# Altium PCB SQUIDCtr_Rev0.PcbDoc (part 3 of 4)
Units mil, origin at the board's own origin, x right, y up, seen from the top; angles counter-clockwise.
Board outline 5765 x 2940 mil, 6 copper layers (Top Layer, Internal Plane 1, Mid-Layer 1, InternalPlane 2, Mid-Layer 2, Bottom Layer), stack 62.5 mil thick; 583 components, 307 nets, 1511 pads, 451 vias.
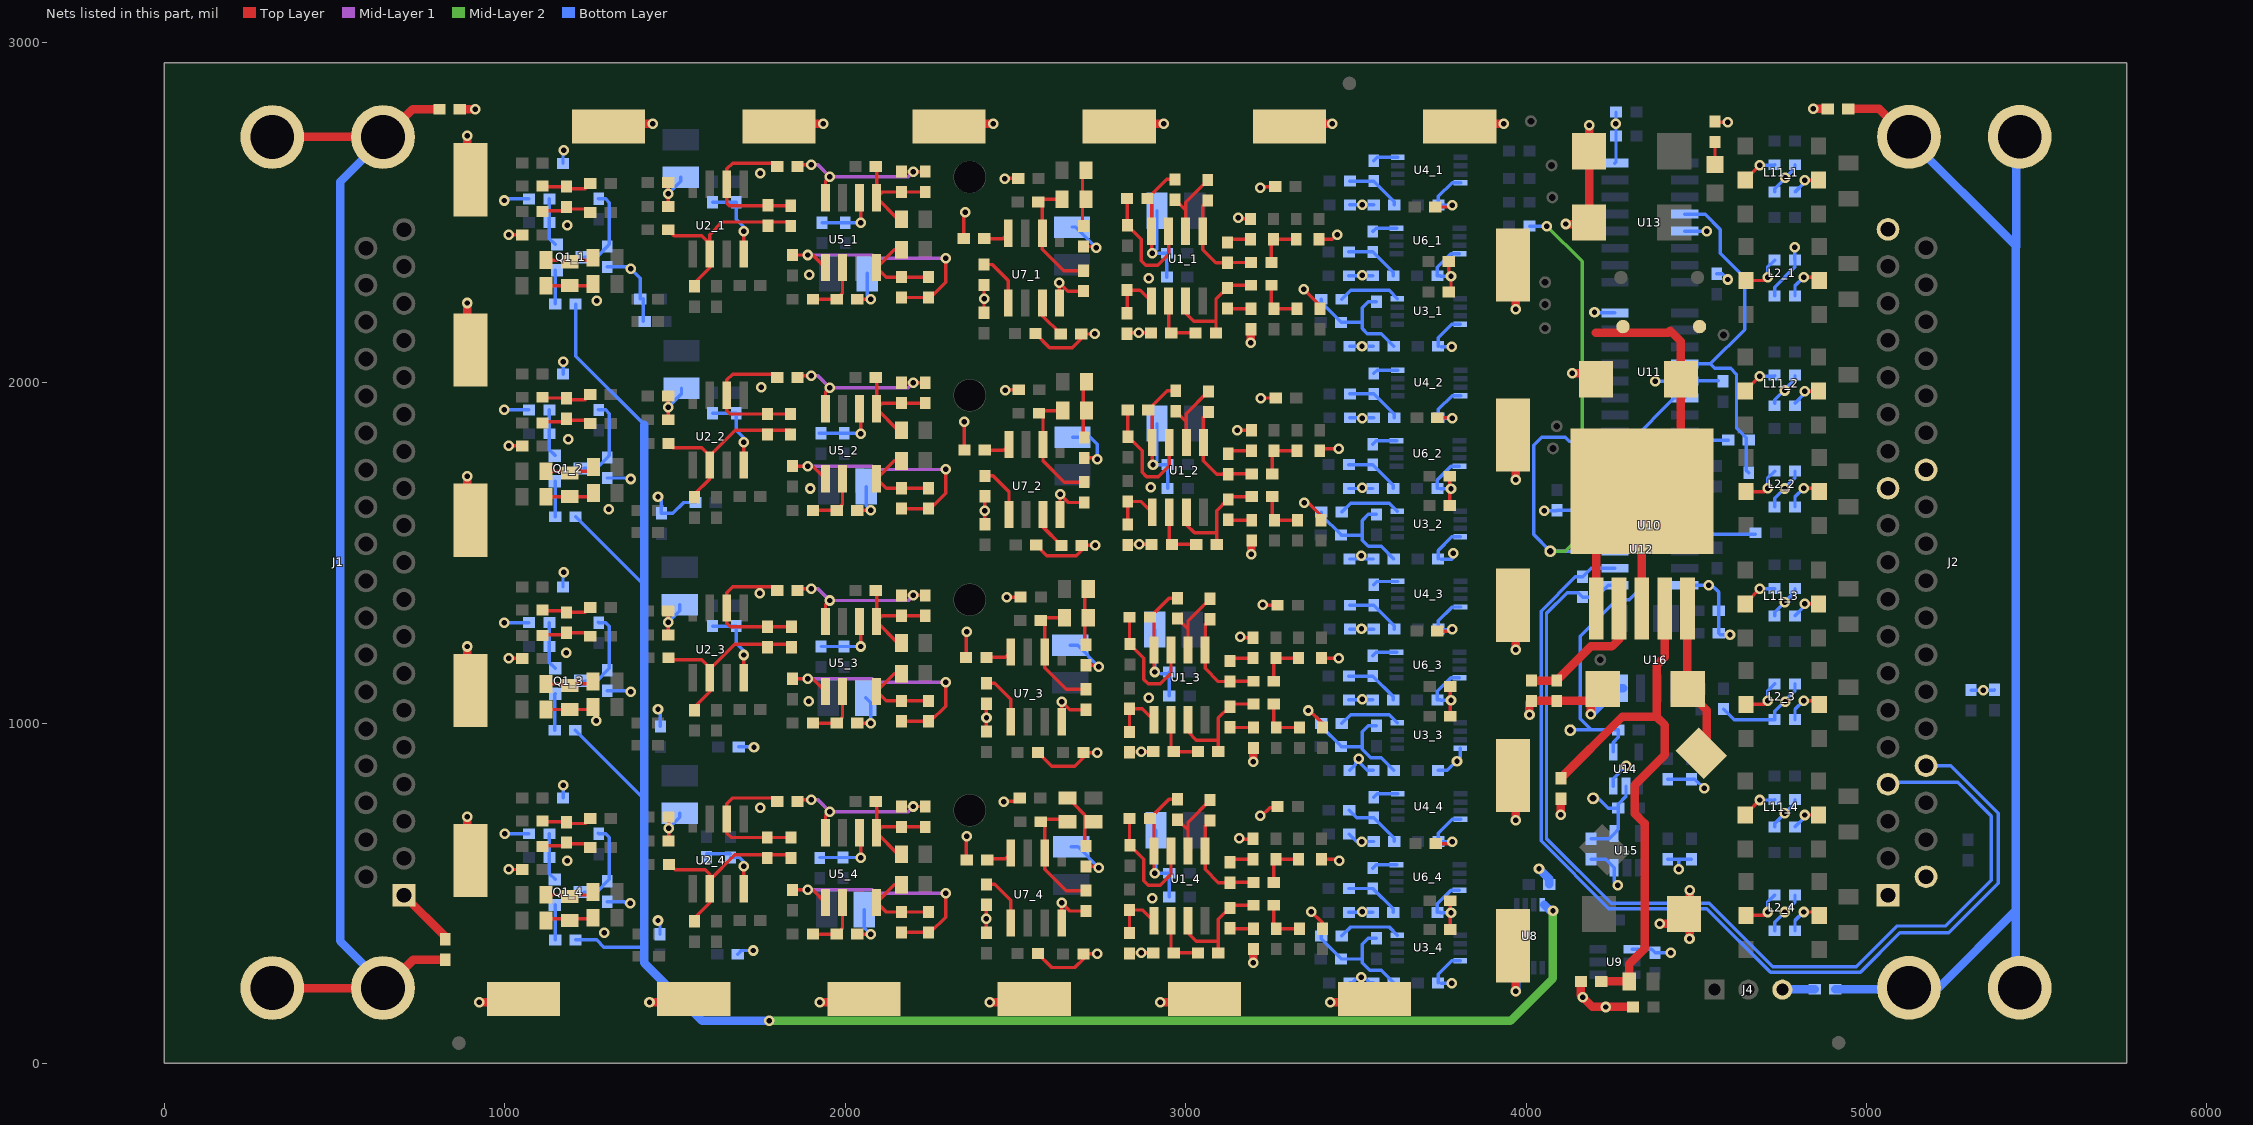
[diagram p7: the nets of this part, all layers, seen from the top]

## Via types
v1: diameter 31, hole 16, Top Layer to Bottom Layer, tented both sides, 451 vias

## Nets (pads, with @x,y where several pads share a name; then routed paths per layer and width w, separated by ;. In a path a pad name is that pad's centre, name@x,y a point inside that pad or via, vN(x,y) a via of type N, cw(c..) or ccw(c..) an arc to the next point about the centre after c; other vN are vias at no path point) (continued)
GND: C1.1 C2.1 C4.1 C5_1.1 C5_2.1 C5_3.1 C5_4.1 C6_1.1 C6_2.1 C6_3.1 C6_4.1 C7_1.1 C7_2.1 C7_3.1 C7_4.1 C8_1.1 C8_2.1 C8_3.1 C8_4.1 C9_1.1 C9_2.1 C9_3.1 C9_4.1 C10.1 C11_1.2 C11_2.2 C11_3.2 C11_4.2 C12_1.2 C12_2.2 C12_3.2 C12_4.2 C13_1.2 C13_2.2 C13_3.2 C13_4.2 C14_1.1 C14_2.1 C14_3.1 C14_4.1 C15_1.2 C15_2.2 C15_3.2 C15_4.2 C16_1.1 C16_2.1 C16_3.1 C16_4.1 C17_1.1 C17_2.1 C17_3.1 C17_4.1 C18_1.1 C18_2.1 C18_3.1 C18_4.1 C19_1.1 C19_2.1 C19_3.1 C19_4.1 C20_1.1 C20_2.1 C20_3.1 C20_4.1 C21_1.1 C21_2.1 C21_3.1 C21_4.1 C22.1 C23.1 C24.2 C25.2 C26_1.2 C26_2.2 C26_3.2 C26_4.2 C27.2 C28.2 C29.2 C30.1 C31.1 C32.1 C33.1 C34.1 C35.1 C36.1 C37.1 C38.1 C39_1.1 C39_2.1 C39_3.1 C39_4.1 C41_1.1 C41_2.1 C41_3.1 C41_4.1 C42_1.1 C42_2.1 C42_3.1 C42_4.1 C44.1 C45_1.1 C45_2.1 C45_3.1 C45_4.1 C46_1.2 C46_2.2 C46_3.2 C46_4.2 C47_1.1 C47_2.1 C47_3.1 C47_4.1 C48_1.1 C48_2.1 C48_3.1 C48_4.1 C49_1.2 C49_2.2 C49_3.2 C49_4.2 C50_1.2 C50_2.2 C50_3.2 C50_4.2 C51_1.2 C51_2.2 C51_3.2 C51_4.2 C52_1.1 C52_2.1 C52_3.1 C52_4.1 C53_1.1 C53_2.1 C53_3.1 C53_4.1 C54_1.1 C54_2.1 C54_3.1 C54_4.1 C55.1 C56.1 C57.1 C58_1.2 C58_2.2 C58_3.2 C58_4.2 C59_1.2 C59_2.2 C59_3.2 C59_4.2 C60_1.1 C60_2.1 C60_3.1 C60_4.1 C61_1.2 C61_2.2 C61_3.2 C61_4.2 C62_1.2 C62_2.2 C62_3.2 C62_4.2 C63_1.1 C63_2.1 C63_3.1 C63_4.1 C64_1.1 C64_2.1 C64_3.1 C64_4.1 C65_1.1 C65_2.1 C65_3.1 C65_4.1 C66_1.1 C66_2.1 C66_3.1 C66_4.1 C67_1.1 C67_2.1 C67_3.1 C67_4.1 C68_1.1 C68_2.1 C68_3.1 C68_4.1 C69_1.1 C69_2.1 C69_3.1 C69_4.1 J1.1 J2.1 J2.12 J2.19 J2.20 J2.31 J4.3 R9_1.2 R9_2.2 R9_3.2 R9_4.2 R17.1 R42.1 R43_1.2 R43_2.2 R43_3.2 R43_4.2 R46_1.2 R46_2.2 R46_3.2 R46_4.2 R47_1.1 R47_2.1 R47_3.1 R47_4.1 R48_1.2 R48_2.2 R48_3.2 R48_4.2 R62.2 R65_1.1 R65_2.1 R65_3.1 R65_4.1 R66.1 R68.1 R73.1 R77_1.1 R77_2.1 R77_3.1 R77_4.1 R78_1.2 R78_2.2 R78_3.2 R78_4.2 R79_1.1 R79_2.1 R79_3.1 R79_4.1 R80_1.2 R80_2.2 R80_3.2 R80_4.2 R83.1 R84.1 R85.2 SH1.1 SH2.1 SH3.1 SH4.1 SH5.1 SH6.1 SH8.1 SH9.1 SH10.1 SH11.1 SH12.1 SH13.1 SH14.1 SH16.1 SH17.1 SH18.1 SH19.1 SH20.1 SH21.1 SH22.1 SH23.1 SH24.1 U1_1.4 U1_2.4 U1_3.4 U1_4.4 U2_1.4 U2_2.4 U2_3.4 U2_4.4 U3_1.8 U3_2.8 U3_3.8 U3_4.8 U4_1.8 U4_2.8 U4_3.8 U4_4.8 U5_1.6 U5_2.6 U5_3.6 U5_4.6 U6_1.8 U6_2.8 U6_3.8 U6_4.8 U7_1.4 U7_2.4 U7_3.4 U7_4.4 U8.8 U9.1 U10.8 U10.12 U11.8 U11.13 U13.8 U13.13 U14.3 U15.3 U16.4 | length 20826.4
  Top Layer w10: R73.1@825,365 R73.1@825,372.72 ; v1(1011,570) R48_4.2@1051,570 ; v1(1011,1190) R48_3.2@1051,1190 ; v1(1011,1815) R48_2.2@1051,1815 ; v1(1011,2435) R48_1.2@1051,2435 ; C9_3.1@1480,1259 v1(1480,1296) C8_3.1@1480,1329 ; C9_1.1@1480,2518 v1(1480,2555) C8_1.1@1480,2588 ; C9_2.1@1480.07,1891.07 v1(1480.07,1928.07) C8_2.1@1480.07,1961.07 ; C9_4.1@1481,654 v1(1481,691) C8_4.1@1481,724 ; U2_4.4@1702,513 v1(1702,580) ; U2_3.4@1702,1133 v1(1702,1200) ; U2_2.4@1702,1758 v1(1702,1825) ; U2_1.4@1702,2378 v1(1702,2445) ; C7_4.1@2035,380 v1(2075,380) ; C7_3.1@2035,1000 v1(2075,1000) ; C7_2.1@2035,1625 v1(2075,1625) ; C7_1.1@2035,2245 v1(2075,2245) ; U5_4.6@2042,678 2045,675 v1(2045,605) ; U5_3.6@2042,1298 2045,1295 v1(2045,1225) ; U5_2.6@2042,1923 2045,1920 v1(2045,1850) ; U5_1.6@2042,2543 2045,2540 v1(2045,2470) ; R46_1.2@2348,2423 v1@2348,2501 ; R46_2.2@2350,1802 v1(2350,1885) ; R46_3.2@2355,1193 v1@2355,1268 ; R46_4.2@2356,609 v1@2356,667 ; C21_1.1@2408,2205 2407.5,2205.5 2407.5,2286.5 C52_1.1@2408,2287 ; C21_2.1@2410,1584 2409.5,1584.5 v1@2409.5,1622 ; C52_2.1@2410,1666 2409.5,1665.5 v1@2409.5,1622 ; v1@2411.5,1624 v1@2409.5,1622 ; C21_4.1@2415,384 2414.5,384.5 v1@2414.5,422 ; C52_4.1@2415,466 2414.5,465.5 v1@2414.5,422 ; C21_3.1@2415,975 2414.5,975.5 v1@2414.5,1013 ; C52_3.1@2415,1057 2414.5,1056.5 v1@2414.5,1013 ; v1@2416.5,424 v1@2414.5,422 ; v1@2416.5,1015 v1@2414.5,1013 ; v1(2465,769) 2465,762 2473,770 2503,770 C53_4.1@2513,780 ; v1(2468,2599) 2469,2600 C53_1.1@2508,2600 ; v1(2470,1978) 2471,1979 C53_2.1@2510,1979 ; v1(2475,1369) 2476,1370 C53_3.1@2515,1370 ; C18_1.1@2559,2144 2600,2103 2667,2103 2693,2129 R47_1.1@2693,2143 v1(2733,2143) ; C18_2.1@2561,1523 2592,1492 2679,1492 2695,1508 R47_2.1@2695,1522 v1(2735,1522) ; C18_4.1@2566,323 2607,282 2674,282 2700,308 R47_4.1@2700,322 v1(2740,322) ; C18_3.1@2566,914 2607,873 2674,873 2700,899 R47_3.1@2700,913 v1(2740,913) ; U7_1.4@2629,2234 v1(2629,2293) 2653,2269 R65_1.1@2700,2269 ; U7_2.4@2631,1613 v1(2631,1672) 2655,1648 R65_2.1@2702,1648 ; U7_4.4@2636,413 v1(2636,472) 2660,448 R65_4.1@2707,448 ; U7_3.4@2636,1004 v1(2636,1063) 2660,1039 R65_3.1@2707,1039 ; C54_1.1@2700,2400 v1@2734,2400 ; C54_2.1@2702,1779 v1@2736,1779 ; C54_4.1@2707,579 v1@2741,579 ; C54_3.1@2707,1170 v1@2741,1170 ; C17_1.1@2830,2146 R9_1.2@2898,2146 v1(2862,2146) ; C17_2.1@2832,1525 R9_2.2@2900,1525 v1(2864,1525) ; C17_4.1@2837,325 R9_4.2@2905,325 v1(2869,325) ; C17_3.1@2837,916 R9_3.2@2905,916 v1(2869,916) ; v1(2902,2380) 2900,2382 U1_1.4@2900,2445 2900,2553 2944,2597 R43_1.2@2969,2597 ; v1(2904,1759) 2902,1761 U1_2.4@2902,1824 2902,1932 2946,1976 R43_2.2@2971,1976 ; v1(2909,559) 2907,561 U1_4.4@2907,624 2907,732 2951,776 R43_4.2@2976,776 ; v1(2909,1150) 2907,1152 U1_3.4@2907,1215 2907,1323 2951,1367 R43_3.2@2976,1367 ; v1(3154,2484) 3157,2481 C48_1.1@3191,2481 ; v1@3156,1863 3159,1860 C48_2.1@3193,1860 ; v1(3158,662) 3161,659 C48_4.1@3195,659 ; v1(3161,1254) 3164,1251 C48_3.1@3198,1251 ; v1(3219,728) 3224,728 3248,752 C60_4.1@3264,752 ; v1(3219,2573) v1@3219,2582 ; v1@3219,2576 C60_1.1@3263,2576 ; v1@3220,1955 C60_2.1@3265,1955 ; v1@3226,1346 C60_3.1@3270,1346 ; v1(3226,1347) v1@3226,1352 ; v1(3347,2274) 3395,2226 C16_1.1@3395,2217 ; v1(3349,1647) 3356,1647 3358,1649 3397,1610 C16_2.1@3397,1596 ; v1@3360,1041 3402,999 C16_3.1@3402,987 ; v1(3369,446) 3402,413 C16_4.1@3402,396 ; C45_1.1@3392,2421 3431,2421 v1(3445,2435) ; C45_2.1@3394,1806 v1(3450,1806) ; C45_4.1@3399,600 3447,600 v1(3451,596) ; C45_3.1@3399,1191 3449,1191 v1(3450,1190) ; C67_1.1@3733,2516 3777.5,2516 v1(3782.5,2521) ; C67_4.1@3735,646 3777.5,646 v1(3782.5,651) ; C67_3.1@3739,1270 3777.5,1270 v1(3782.5,1275) ; C67_2.1@3739,1897 3781.5,1897 v1(3782.5,1896) ; C68_1.1@3773,2260 3779.5,2266.5 v1(3779.5,2313) 3773,2319.5 C69_1.1@3773,2356 ; C68_2.1@3775,1634 3776,1635 C69_2.1@3776,1725 ; C68_4.1@3776,393 C68_4.1@3777,394 C69_4.1@3777,478 ; C68_3.1@3777,1020 C69_3.1@3777,1108 ; R85.2@4555,2767 4556.62,2765.38 v1(4592.85,2765.38)
  Top Layer w25: J1.1@703.92,493.8 R73.1@825,372.72 ; R42.1@868,2803 v1(913,2803) ; SH1.1@890,603 v1(890,725) ; SH24.1@890,1103 v1(890,1225) ; SH23.1@890,1603 v1(890,1725) ; SH22.1@890,2103 v1(890,2234) ; v1(890,2725) 890,2605 SH21.1@899,2596 ; v1(925,180) SH2.1@1078,180 ; SH20.1@1313,2760 v1(1435,2760) ; SH20.1@1336,2752 SH20.1@1344,2760 ; v1(1425,180) SH3.1@1547,180 ; SH19.1@1805,2752 1813,2760 v1(1935,2760) ; v1(1925,180) SH4.1@2047,180 ; SH18.1@2305,2730 SH18.1@2305,2752 ; SH18.1@2313,2760 v1(2435,2760) ; v1(2425,180) SH5.1@2547,180 ; SH17.1@2813,2760 v1(2935,2760) ; v1(2925,180) SH6.1@3047,180 ; v1(3191,2117) 3191,2156 C19_1.1@3192,2157 ; v1(3193,1496) 3193,1535 C19_2.1@3194,1536 ; v1(3198,296) 3198,335 C19_4.1@3199,336 ; v1(3198,887) 3198,926 C19_3.1@3199,927 ; SH16.1@3308,2760 v1(3430,2760) ; v1(3425,180) SH8.1@3547,180 ; SH14.1@3813,2760 v1(3935,2760) ; v1@3970,210 SH9.1@3970,337 ; v1(3970,715) SH10.1@3970,837 ; v1(3970,1215) SH11.1@3970,1337 ; v1(3970,1715) SH12.1@3970,1837 ; v1(3970,2215) SH13.1@3970,2337 ; v1(4010,1025) 4010,1059 R68.1@4016,1065 C57.1@4090,1065 4190,1065 v1(4190,1026) ; v1(4102,731) C56.1@4102,778 ; v1(4117,2466) 4181,2466 C29.2@4185,2470 C27.2@4185,2680 v1(4185,2756) ; v1(4135,2028) 4187,2028 C28.2@4205,2010 ; C55.1@4161,241 4161,200 4195,166 C4.1@4314,166 ; v1(4392,411) 4436,411 C24.2@4464,439 ; v1(4480,366) 4481,367 v1(4481,509) ; v1(4843,2804) R66.1@4886,2804
  Bottom Layer w10: v1(998,1295) C59_3.2@1071,1295 ; v1(998,2535) 1003,2540 C59_1.2@1071,2540 ; v1(999,1920) C59_2.2@1071,1920 ; v1(1000,675) C59_4.2@1071,675 ; C26_4.2@1171,780 1172,781 v1(1172,817) ; C26_3.2@1171,1400 1171,1441 v1(1173,1443) ; C26_2.2@1171,2025 1172,2026 v1(1172,2061) ; C26_1.2@1171,2644 1171,2681 v1(1173,2683) ; C58_4.2@1301,475 1351,475 1355,471 v1(1369,471) ; C58_3.2@1301,1095 1367,1095 v1(1370,1092) ; C58_2.2@1301,1720 1367,1720 v1(1370,1717) ; C58_1.2@1301,2340 v1@1365,2340 ; v1(1370,2335) 1398,2307 C62_1.2@1398,2246 ; C61_1.2@1407,2180 C62_1.2@1407,2246 ; v1(1450,420) 1456,414 C62_4.2@1456,380 ; v1(1450,1040) 1457,1033 C62_3.2@1457,990 ; v1(1450,1665) 1460,1655 C62_2.2@1460,1616 1493.48,1616 1525.48,1648 C61_2.2@1560,1648 ; v1(1480,1296) 1514,1330 C63_3.1@1514,1347.88 ; v1(1480,2555) 1517,2592 C63_1.1@1517,2602.88 ; v1(1480.07,1928.07) 1519,1967 C63_2.1@1519,1983.88 ; v1(1481,691) 1514,724 C63_4.1@1514,734.88 ; C6_4.1@1593,616 C5_4.1@1663,616 ; C6_3.1@1610,1285 C5_3.1@1680,1285 1680,1235 1702,1213 v1(1702,1200) ; C6_2.1@1610,1910 C5_2.1@1680,1910 1680,1860 1702,1838 v1(1702,1825) ; C6_1.1@1610,2530 C5_1.1@1680,2530 1680,2480 1702,2458 v1(1702,2445) ; C5_4.1@1663,605 1690,605 1702,593 v1(1702,580) ; C61_4.2@1684,321 1695,332 v1(1730,332) ; C61_3.2@1687,930 1731,930 v1(1732,929) ; C41_2.1@1924,1851 v1@2045,1851 ; C41_4.1@1925,605 v1(2045,605) ; C41_3.1@1929,1225 v1(2045,1225) ; C41_1.1@1932,2470 v1(2045,2470) ; C64_4.1@2056.12,452 2056.12,398.88 v1(2075,380) ; C64_3.1@2060.12,1074 2075,1059.12 v1(2075,1000) ; C64_2.1@2062.12,1695 2062.12,1637.88 v1(2075,1625) ; C64_1.1@2065.12,2321 2065.12,2254.88 v1(2075,2245) ; C66_3.1@2661,1228.12 2682.88,1228.12 v1(2745,1166) ; C66_4.1@2664,636.12 2683.88,636.12 v1(2745,575) ; C66_1.1@2666,2457.12 2676.88,2457.12 v1(2738,2396) ; C66_2.1@2668,1839.12 2719.88,1839.12 2740,1819 v1(2740,1775) ; C65_3.1@2908.88,1275 2908.88,1150.12 v1(2909,1150) ; C65_4.1@2912.88,685 2912.88,562.88 v1(2909,559) C39_4.1@2952,559 C20_4.1@2952,489 ; C65_2.1@2915.88,1880 2915.88,1770.88 v1(2904,1759) C39_2.1@2947,1759 C20_2.1@2947,1689 ; C65_1.1@2915.88,2505 2915.88,2393.88 v1(2902,2380) C39_1.1@2945,2380 C20_1.1@2945,2310 ; 2928,1145 C39_3.1@2952,1145 ; C20_3.1@2952,1080 C39_3.1@2952,1150 ; C51_4.2@3479.5,444 C50_4.2@3549.5,444 ; C51_3.2@3479.5,1068 C50_3.2@3549.5,1068 ; C51_2.2@3479.5,1689 C50_2.2@3549.5,1689 ; C51_1.2@3479.5,2314 C50_1.2@3549.5,2314 ; C46_4.2@3480.5,674 3502.5,652 C15_4.2@3552.5,652 ; C13_4.2@3481.5,237 3490,237 3515.5,262.5 3541,237 C49_4.2@3551.5,237 ; C13_3.2@3481.5,861 3499,878.5 3499,893 3501,895 v1(3508,895) ; C13_2.2@3481.5,1482 C49_2.2@3551.5,1482 ; C13_1.2@3481.5,2107 C49_1.2@3551.5,2107 ; C46_3.2@3482.5,1276 C15_3.2@3552.5,1276 ; C46_2.2@3482.5,1897 C15_2.2@3552.5,1897 ; C46_1.2@3482.5,2522 C15_1.2@3552.5,2522 ; v1@3501.5,893.5 3534,861 C49_3.2@3551.5,861 ; C11_4.2@3741.5,237 3741.5,262 3781.5,302 U3_4.8@3806.5,302 ; C11_3.2@3741.5,861 3768.61,861 3806.5,898.89 U3_3.8@3806.5,926 ; C11_2.2@3741.5,1482 3741.5,1507 3781.5,1547 U3_2.8@3806.5,1547 ; C11_1.2@3741.5,2107 3741.5,2132 3781.5,2172 U3_1.8@3806.5,2172 ; C12_4.2@3742.5,652 3742.5,677 3782.5,717 U4_4.8@3807.5,717 ; C12_3.2@3742.5,1276 3742.5,1301 3782.5,1341 U4_3.8@3807.5,1341 ; C12_2.2@3742.5,1897 3742.5,1922 3782.5,1962 U4_2.8@3807.5,1962 ; C12_1.2@3742.5,2522 3742.5,2547 3782.5,2587 U4_1.8@3807.5,2587 ; C11_4.2@3751,236 v1(3781.5,236) ; C11_2.2@3751,1481 3781.5,1481 3786,1485.5 v1(3786,1499) ; C11_1.2@3751,2106 v1(3781.5,2106) ; C12_4.2@3752,651 v1(3782.5,651) ; C12_3.2@3752,1275 v1(3782.5,1275) ; C12_2.2@3752,1896 v1(3782.5,1896) ; C12_1.2@3752,2521 v1(3782.5,2521) ; v1(3779.5,443) 3749,443 3748,444 C14_4.1@3739.5,444 3739.5,469 3779.5,509 U6_4.8@3804.5,509 ; v1(3779.5,1067) 3749,1067 3748,1068 C14_3.1@3739.5,1068 3739.5,1093 3779.5,1133 U6_3.8@3804.5,1133 ; v1(3779.5,1688) 3749,1688 3748,1689 C14_2.1@3739.5,1689 3739.5,1714 3779.5,1754 U6_2.8@3804.5,1754 ; v1(3779.5,2313) 3749,2313 3748,2314 C14_1.1@3739.5,2314 3739.5,2339 3779.5,2379 U6_1.8@3804.5,2379 ; v1@3970,215 v1@3973,218 ; v1(4053,1624) 4090,1624 C2.1@4091,1625 4160,1625 4230,1555 U10.12@4261,1555 ; C23.1@4191,600 4233.5,600 U15.3@4258.5,575 4258.5,533.5 v1(4269,523) ; v1(4201,2207) 4210,2207 4211,2208 4214,2205 U11.8@4261,2205 ; U14.3@4256,815 4256,836.71 4293.29,874 v1(4294,874) ; U13.8@4261,2645 4264,2648 C37.1@4264,2725 v1(4264,2760) C38.1@4264,2795 ; U9.1@4311,335.5 4368.5,335.5 C30.1@4379,325 v1(4425,325) ; v1(4380,2004) 4465,2004 U11.13@4466,2005 C36.1@4564,2005 ; C32.1@4416,600 4454,600 ; C34.1@4416,835 C33.1@4486,835 4496,835 v1(4523,808) ; v1(4448.71,570) 4448.71,594.71 4454,600 ; U10.8@4466,1405 4546,1405 4566,1385 C44.1@4566,1330 C10.1@4566,1264 4570,1260 v1(4599,1260) ; U13.13@4466,2445 v1(4531,2445) ; C31.1@4486,600 4454,600 ; C35.1@4560,2320 4576,2320 v1(4593,2303) ; R62.2@4580,1041 4611,1010 R78_3.2@4730,1010 4730,1035 4790,1095 R77_3.1@4790,1115 ; R78_4.2@4730,390 4730,415 4790,475 R77_4.1@4790,495 ; R80_4.2@4730,695 4730,705 4790,765 R79_4.1@4790,775 ; R80_3.2@4730,1315 4730,1325 4790,1385 R79_3.1@4790,1395 ; R78_2.2@4730,1635 4730,1660 4790,1720 R77_2.1@4790,1740 ; R80_2.2@4730,1940 4730,1950 4790,2010 R79_2.1@4790,2020 ; R78_1.2@4730,2255 4730,2280 4790,2340 R77_1.1@4790,2360 4789,2361 v1(4789,2398) ; R80_1.2@4730,2560 4730,2570 4790,2630 R79_1.1@4790,2640 ; J4.3@4753,217 J4.3@4754,218 ; R83.1@5307,1097 5375,1097 R84.1@5376,1098
  Bottom Layer w20: v1@3973,218 U8.8@3973,281
  Bottom Layer w25: v1(4038,572) 4068,542 C22.1@4068,526 ; v1(4190,1026) 4266,1102 U16.4@4286,1102 ; J4.3@4754,218 R17.1@4848,218
  other v1: 4234,166 4167,194 3970,212 3516,253 1292,384 2414,425 4760,445 3518.5,446 2902,485 1184,596 3517.5,652 2357,667 4760,735 1750,751 3797,888 2415,1015 3360,1037 4761,1063 1893,1064 3518.5,1070 2891,1074 5343,1097 1181,1207 2357,1268 3516.5,1277 4760,1355 4536,1405 3516,1492 2410,1624 1305,1627.96 1897,1689 4760,1689 3518.5,1691 2898,1693 1186,1834 3151,1860 3518.5,1896 3220,1954 4760,1977 1753,1987 3518,2107 1270,2240 2408,2246 2892,2307 3518.5,2316 1894,2317 1183,2462 2352,2501 3518.5,2522 4761.56,2601.5 1750,2615
HEATERDACVOLTAGE: R6_1.2 R6_2.2 R6_3.2 R6_4.2 U8.4 | length 5820.7
  Mid-Layer 2 w25: v1(1777,125) 3954,125 4079,250 v1(4079,449)
  Bottom Layer w10: R6_3.2@1207,979 1407,779 1409,779 ; R6_4.2@1208,363 1270,363 1291,342 1409,342 ; R6_2.2@1208,1606 1409,1405 ; R6_1.2@1208,2231 1208,2078 1409,1877
  Bottom Layer w25: 1409,1877 1409,1405 1409,342 1409,296 1580,125 v1(1777,125) ; U8.4@4054,466 4071,449 v1(4079,449)
LOADREG: R33.2 R34.1 U11.12 U13.12 | length 1059.7
  Bottom Layer w10: U11.12@4466,2055 4540.96,2055 ; U13.12@4466,2495 4525.72,2495 4570.86,2449.86 4570.86,2380.14 4641,2310 4642,2310 4642,2156.04 4540.96,2055 ; R33.2@4654,1735 4647,1742 4647,1838 4618,1867 4618,2025 4601,2042 4553.96,2042 4540.96,2055
MOSI: MOSI.1 R30.2 U10.11 U11.14 | length 2147.2
  Mid-Layer 2 w10: v1(4061,2460) 4165,2356 4165,1555 4115,1505 MOSI.1@4071,1505
  Bottom Layer w10: R30.2@4010,2460 v1(4061,2460) ; 4046,1839.5 4115.5,1839.5 4128,1827 4307.21,1827 4435.21,1955 U11.14@4466,1955 ; 4046,1840 4022,1816 4022,1554 MOSI.1@4071,1505 U10.11@4261,1505
MOSI_N: J2.4 R76.1 U10.9 | length 3014
  Bottom Layer w10: U10.9@4261,1405 4241,1405 4206,1370 R76.1@4166,1370 4153,1383 4120.63,1383 4060,1322.37 4060,660.63 4249.63,471 4537.63,471 4724.63,284 4970,284 5090,404 5233,404 5367,538 5367,727 5268,826 J2.4@5059,826
MOSI_P: J2.23 R76.2 U10.10 | length 3030.8
  Bottom Layer w10: U10.10@4261,1455 4191,1455 R76.2@4166,1430 4145,1430 4044,1329 4044,654 4243,455 4531,455 4718,268 4982.28,268 5098.28,384 5241.28,384 5387,529.72 5387,735.28 5247.8,874.49 J2.23@5174.89,874.49
NetC3_1_1: C3_1.1 R50_1.1 R55_1.1 R71_1.1 U5_1.5 | length 341.1
  Top Layer w10: R71_1.1@2092,2635 U5_1.5@2092,2543 ; R55_1.1@2165,2480 2155,2480 U5_1.5@2092,2543 ; R50_1.1@2235,2560 C3_1.1@2165,2560 2109,2560 U5_1.5@2092,2543
NetC3_1_2: C3_1.2 R50_1.2 R54_1.1 U5_1.8 | length 493.1
  Top Layer w10: R54_1.1@1865,2640 v1(1900,2640) ; U5_1.8@1942,2543 1942,2592 v1(1955,2605) ; C3_1.2@2165,2620 v1(2200,2620) R50_1.2@2235,2620
  Mid-Layer 1 w10: v1(1900,2640) 1920,2640 v1(1955,2605) 2185,2605 v1(2200,2620)
NetC3_2_1: C3_2.1 R50_2.1 R55_2.1 R71_2.1 U5_2.5 | length 341.1
  Top Layer w10: R71_2.1@2092,2015 U5_2.5@2092,1923 ; R55_2.1@2165,1860 2155,1860 U5_2.5@2092,1923 ; R50_2.1@2235,1940 C3_2.1@2165,1940 2109,1940 U5_2.5@2092,1923
NetC3_2_2: C3_2.2 R50_2.2 R54_2.1 U5_2.8 | length 493.1
  Top Layer w10: R54_2.1@1865,2020 v1(1900,2020) ; U5_2.8@1942,1923 1942,1972 v1(1955,1985) ; C3_2.2@2165,2000 v1(2200,2000) R50_2.2@2235,2000
  Mid-Layer 1 w10: v1(1900,2020) 1920,2020 v1(1955,1985) 2185,1985 v1(2200,2000)
NetC3_3_1: C3_3.1 R50_3.1 R55_3.1 R71_3.1 U5_3.5 | length 341.1
  Top Layer w10: R71_3.1@2092,1390 U5_3.5@2092,1298 ; R55_3.1@2165,1235 2155,1235 U5_3.5@2092,1298 ; R50_3.1@2235,1315 C3_3.1@2165,1315 2109,1315 U5_3.5@2092,1298
NetC3_3_2: C3_3.2 R50_3.2 R54_3.1 U5_3.8 | length 493.1
  Top Layer w10: R54_3.1@1865,1395 v1(1900,1395) ; U5_3.8@1942,1298 1942,1347 v1(1955,1360) ; C3_3.2@2165,1375 v1(2200,1375) R50_3.2@2235,1375
  Mid-Layer 1 w10: v1(1900,1395) 1920,1395 v1(1955,1360) 2185,1360 v1(2200,1375)
NetC3_4_1: C3_4.1 R50_4.1 R55_4.1 R71_4.1 U5_4.5 | length 341.1
  Top Layer w10: R71_4.1@2092,770 U5_4.5@2092,678 ; R55_4.1@2165,615 2155,615 U5_4.5@2092,678 ; R50_4.1@2235,695 C3_4.1@2165,695 2109,695 U5_4.5@2092,678
NetC3_4_2: C3_4.2 R50_4.2 R54_4.1 U5_4.8 | length 493.1
  Top Layer w10: R54_4.1@1865,775 v1(1900,775) ; U5_4.8@1942,678 1942,727 v1(1955,740) ; C3_4.2@2165,755 v1(2200,755) R50_4.2@2235,755
  Mid-Layer 1 w10: v1(1900,775) 1920,775 v1(1955,740) 2185,740 v1(2200,755)
NetC7_1_2: C7_1.2 R52_1.2 U5_1.2 | length 170
  Top Layer w10: R52_1.2@1905,2245 C7_1.2@1975,2245 1992,2262 U5_1.2@1992,2338
NetC7_2_2: C7_2.2 R52_2.2 U5_2.2 | length 170
  Top Layer w10: R52_2.2@1905,1625 C7_2.2@1975,1625 1992,1642 U5_2.2@1992,1718
NetC7_3_2: C7_3.2 R52_3.2 U5_3.2 | length 170
  Top Layer w10: R52_3.2@1905,1000 C7_3.2@1975,1000 1992,1017 U5_3.2@1992,1093
NetC7_4_2: C7_4.2 R52_4.2 U5_4.2 | length 170
  Top Layer w10: R52_4.2@1905,380 C7_4.2@1975,380 1992,397 U5_4.2@1992,473
NetC15_1_1: C15_1.1 R22_1.2 R23_1.1 | length 164.9
  Bottom Layer w10: R23_1.1@3482.5,2592 R22_1.2@3552.5,2592 3612.5,2532 C15_1.1@3612.5,2522
NetC15_2_1: C15_2.1 R22_2.2 R23_2.1 | length 164.9
  Bottom Layer w10: R23_2.1@3482.5,1967 R22_2.2@3552.5,1967 3612.5,1907 C15_2.1@3612.5,1897
NetC15_3_1: C15_3.1 R22_3.2 R23_3.1 | length 164.9
  Bottom Layer w10: R23_3.1@3482.5,1346 R22_3.2@3552.5,1346 3612.5,1286 C15_3.1@3612.5,1276
NetC15_4_1: C15_4.1 R22_4.2 R23_4.1 | length 176
  Bottom Layer w10: R23_4.1@3480.5,744 3502.5,722 R22_4.2@3552.5,722 3612.5,662 C15_4.1@3612.5,652
NetC17_1_2: C17_1.2 R69_1.1 U1_1.5 | length 153.3
  Top Layer w10: C17_1.2@2828,2204 R69_1.1@2828,2272 2866,2272 2898,2240 U1_1.5@2900,2240
NetC17_2_2: C17_2.2 R69_2.1 U1_2.5 | length 153.3
  Top Layer w10: C17_2.2@2830,1583 R69_2.1@2830,1651 2868,1651 2900,1619 U1_2.5@2902,1619
NetC17_3_2: C17_3.2 R69_3.1 U1_3.5 | length 153.3
  Top Layer w10: C17_3.2@2835,974 R69_3.1@2835,1042 2873,1042 2905,1010 U1_3.5@2907,1010
NetC17_4_2: C17_4.2 R69_4.1 U1_4.5 | length 153.3
  Top Layer w10: C17_4.2@2835,383 R69_4.1@2835,451 2873,451 2905,419 U1_4.5@2907,419
NetC19_1_2: C19_1.2 R14_1.2 | length 69.4
  Top Layer w10: R14_1.2@3123,2218 3124,2217 C19_1.2@3192,2217
NetC19_2_2: C19_2.2 R14_2.2 | length 69.4
  Top Layer w10: R14_2.2@3125,1597 3126,1596 C19_2.2@3194,1596
NetC19_3_2: C19_3.2 R14_3.2 | length 69.4
  Top Layer w10: R14_3.2@3130,988 3131,987 C19_3.2@3199,987
NetC19_4_2: C19_4.2 R14_4.2 | length 69.4
  Top Layer w10: R14_4.2@3130,397 3131,396 C19_4.2@3199,396
NetC23_2: C23.2 LRCap.1 R15.1 U14.2 U15.4 | length 314.2
  Bottom Layer w10: C23.2@4191,660 4243.5,660 U15.4@4258.5,675 4271,687.5 R15.1@4271,750 ; LRCap.1@4197,779 4212,779 4241,750 R15.1@4271,750 ; U14.2@4293.5,815 4293.5,784.5 4271,762 R15.1@4271,750
NetC25_1: C25.1 L3.2 U12.5 | length 441.1
  Top Layer w25: U12.5@4474.02,1336.5 4474.02,1100.98 C25.1@4475,1100 4475,1093 4531,1037 L3.2@4531,919
NetC28_1: C28.1 L5.1 L6.1 U12.1 U12.3 U12.6 | length 1530.4
  Top Layer w25: 4204,2147 4417,2147 4423,2153 4455,2121 C28.1@4455,2010 4455,1795.98 U12.6@4340,1680.98 ; U12.1@4205.98,1304.98 U12.1@4205.98,1336.5 4205.98,1546.97 U12.6@4340,1680.98 ; U12.3@4340,1336.5 U12.6@4340,1680.98
NetC40_1_1: C40_1.1 R54_1.2 R58_1.1 U2_1.6 | length 436.9
  Top Layer w10: R54_1.2@1790,2645 1669,2645 1652,2628 U2_1.6@1652,2583 1652,2527 1659,2520 R58_1.1@1840,2520
NetC40_1_2: C40_1.2 R53_1.1 R58_1.2 R59_1.2 U2_1.2 | length 567.9
  Top Layer w10: R53_1.1@1480,2449 1497,2432 1578,2432 U2_1.2@1602,2408 ; R59_1.2@1557,2283 1557,2292 1602,2337 U2_1.2@1602,2378 U2_1.2@1602,2408 ; R58_1.2@1840,2460 1828,2472 1639,2472 1602,2435 U2_1.2@1602,2408
NetC40_2_1: C40_2.1 R54_2.2 R58_2.1 U2_2.6 | length 426.8
  Top Layer w10: R54_2.2@1790,2025 1669,2025 1652,2008 U2_2.6@1652,1963 1652,1917 1661,1908 C40_2.1@1772,1908 R58_2.1@1839,1908
NetC40_2_2: C40_2.2 R53_2.1 R58_2.2 R59_2.2 U2_2.2 | length 544.6
  Top Layer w10: R53_2.1@1481,1821 1493,1809 1578,1809 U2_2.2@1602,1785 ; R59_2.2@1557,1663 1557,1672 1602,1717 U2_2.2@1602,1758 U2_2.2@1602,1785 ; R58_2.2@1839,1860 1677,1860 U2_2.2@1602,1785
NetC40_3_1: C40_3.1 R54_3.2 R58_3.1 U2_3.6 | length 429.2
  Top Layer w10: R54_3.2@1790,1400 1669,1400 1652,1383 U2_3.6@1652,1338 1652,1293 1662,1283 C40_3.1@1772,1283 R58_3.1@1842,1283
  other v1: 1749,1382
NetC40_3_2: C40_3.2 R53_3.1 R58_3.2 R59_3.2 U2_3.2 | length 543.6
  Top Layer w10: R53_3.1@1481,1192 1487,1186 1578,1186 U2_3.2@1602,1162 ; R59_3.2@1557,1038 1557,1047 1602,1092 U2_3.2@1602,1133 U2_3.2@1602,1162 ; R58_3.2@1841,1231 1676,1231 1607,1162 U2_3.2@1602,1162
NetC40_4_1: C40_4.1 R54_4.2 R58_4.1 U2_4.6 | length 425.4
  Top Layer w10: R54_4.2@1790,780 1669,780 1652,763 U2_4.6@1652,718 1652,677 1665,664 C40_4.1@1771,664 R58_4.1@1841,664
NetC40_4_2: C40_4.2 R53_4.1 R58_4.2 R59_4.2 U2_4.2 | length 549.3
  Top Layer w10: R53_4.1@1482,585 1485,585 1501,569 1589,569 1602,556 U2_4.2@1602,539 ; R59_4.2@1557,418 1557,427 1602,472 U2_4.2@1602,513 U2_4.2@1602,539 ; R58_4.2@1832,613 1676,613 U2_4.2@1602,539
NetC43_1_1: C43_1.1 R57_1.1 R60_1.1 U5_1.4 | length 259.1
  Top Layer w10: R57_1.1@2165,2390 2144,2390 U5_1.4@2092,2338 2120,2310 C43_1.1@2165,2310 R60_1.1@2245,2310
NetC43_1_2: C43_1.2 R56_1.1 R60_1.2 U5_1.1 | length 740.1
  Top Layer w10: R56_1.1@1845,2375 v1(1890,2375) 1905,2375 U5_1.1@1942,2338 ; C43_1.2@2165,2250 R60_1.2@2245,2250 2250,2250 2295,2295 v1(2295,2365)
  Mid-Layer 1 w10: v1(1890,2375) 2080,2375 2090,2365 v1(2295,2365)
NetC43_2_1: C43_2.1 R57_2.1 R60_2.1 U5_2.4 | length 259.1
  Top Layer w10: R57_2.1@2165,1770 2144,1770 U5_2.4@2092,1718 2120,1690 C43_2.1@2165,1690 R60_2.1@2245,1690
NetC43_2_2: C43_2.2 R56_2.1 R60_2.2 U5_2.1 | length 740.1
  Top Layer w10: R56_2.1@1845,1755 v1(1890,1755) 1905,1755 U5_2.1@1942,1718 ; C43_2.2@2165,1630 R60_2.2@2245,1630 2250,1630 2295,1675 v1(2295,1745)
  Mid-Layer 1 w10: v1(1890,1755) 2080,1755 2090,1745 v1(2295,1745)
NetC43_3_1: C43_3.1 R57_3.1 R60_3.1 U5_3.4 | length 259.1
  Top Layer w10: R57_3.1@2165,1145 2144,1145 U5_3.4@2092,1093 2120,1065 C43_3.1@2165,1065 R60_3.1@2245,1065
NetC43_3_2: C43_3.2 R56_3.1 R60_3.2 U5_3.1 | length 740.1
  Top Layer w10: R56_3.1@1845,1130 v1(1890,1130) 1905,1130 U5_3.1@1942,1093 ; C43_3.2@2165,1005 R60_3.2@2245,1005 2250,1005 2295,1050 v1(2295,1120)
  Mid-Layer 1 w10: v1(1890,1130) 2080,1130 2090,1120 v1(2295,1120)
NetC43_4_1: C43_4.1 R57_4.1 R60_4.1 U5_4.4 | length 259.1
  Top Layer w10: R57_4.1@2165,525 2144,525 U5_4.4@2092,473 2120,445 C43_4.1@2165,445 R60_4.1@2245,445
NetC43_4_2: C43_4.2 R56_4.1 R60_4.2 U5_4.1 | length 740.1
  Top Layer w10: R56_4.1@1845,510 v1(1890,510) 1905,510 U5_4.1@1942,473 ; C43_4.2@2165,385 R60_4.2@2245,385 2250,385 2295,430 v1(2295,500)
  Mid-Layer 1 w10: v1(1890,510) 2080,510 2090,500 v1(2295,500)
NetC47_1_2: C47_1.2 R70_1.1 U1_1.3 | length 367
  Top Layer w10: C47_1.2@2828,2541 2828,2463 R70_1.1@2829,2462 2870,2421 2870,2358 2883,2345 2918,2345 2950,2377 U1_1.3@2950,2445
NetC47_2_2: C47_2.2 R70_2.1 U1_2.3 | length 367
  Top Layer w10: C47_2.2@2830,1920 2830,1842 R70_2.1@2831,1841 2872,1800 2872,1737 2885,1724 2920,1724 2952,1756 U1_2.3@2952,1824
NetC47_3_2: C47_3.2 R70_3.1 U1_3.3 | length 367
  Top Layer w10: C47_3.2@2835,1311 2835,1233 R70_3.1@2836,1232 2877,1191 2877,1128 2890,1115 2925,1115 2957,1147 U1_3.3@2957,1215
NetC47_4_2: C47_4.2 R70_4.1 U1_4.3 | length 367
  Top Layer w10: C47_4.2@2835,720 2835,642 R70_4.1@2836,641 2877,600 2877,537 2890,524 2925,524 2957,556 U1_4.3@2957,624
NetC48_1_2: C48_1.2 R49_1.2 | length 71.7
  Top Layer w10: R49_1.2@3123,2412 3132,2421 C48_1.2@3191,2421
NetC48_2_2: C48_2.2 R49_2.2 | length 71.7
  Top Layer w10: R49_2.2@3125,1791 3134,1800 C48_2.2@3193,1800
NetC48_3_2: C48_3.2 R49_3.2 | length 71.7
  Top Layer w10: R49_3.2@3130,1182 3139,1191 C48_3.2@3198,1191
NetC48_4_2: C48_4.2 R49_4.2 | length 71.7
  Top Layer w10: R49_4.2@3130,591 3139,600 C48_4.2@3198,600
NetC49_1_1: C49_1.1 R24_1.2 R25_1.1 R41_1.1 | length 378.4
  Bottom Layer w10: R24_1.2@3398.5,2245 3398.5,2236 R41_1.1@3456.5,2178 ; R41_1.1@3456.5,2177 3517.5,2177 3518.5,2178 ; R25_1.1@3560.5,2238 3536.5,2238 3518.5,2220 3518.5,2178 ; C49_1.1@3611.5,2107 3574.5,2144 3533.5,2144 3518.5,2159 3518.5,2178
NetC49_2_1: C49_2.1 R24_2.2 R25_2.1 R41_2.1 | length 376.4
  Bottom Layer w10: R24_2.2@3398.5,1620 3398.5,1611 R41_2.1@3456.5,1553 ; R41_2.1@3456.5,1552 3517.5,1552 3518.5,1553 ; R25_2.1@3560.5,1613 3536.5,1613 3518.5,1595 3518.5,1553 ; C49_2.1@3611.5,1482 3574.5,1519 3537,1519 3518.5,1537.5 3518.5,1553
NetC49_3_1: C49_3.1 R24_3.2 R25_3.1 R41_3.1 | length 372.2
  Bottom Layer w10: R24_3.2@3398.5,999 3398.5,990 R41_3.1@3456.5,932 ; R41_3.1@3456.5,931 3517.5,931 3518.5,932 ; R25_3.1@3560.5,992 3536.5,992 3518.5,974 3518.5,932 ; C49_3.1@3611.5,861 3574.5,898 3544.06,898 3518.5,923.56 3518.5,932
NetC49_4_1: C49_4.1 R24_4.2 R25_4.1 R41_4.1 | length 374.4
  Bottom Layer w10: R24_4.2@3398.5,375 3398.5,366 R41_4.1@3456.5,308 ; R41_4.1@3456.5,307 3517.5,307 3518.5,308 ; R25_4.1@3560.5,368 3536.5,368 3518.5,350 3518.5,308 ; C49_4.1@3611.5,237 3574.5,274 3540.37,274 3518.5,295.87 3518.5,308
NetC50_1_1: C50_1.1 R26_1.2 R27_1.1 | length 164.9
  Bottom Layer w10: R27_1.1@3479.5,2384 R26_1.2@3549.5,2384 3609.5,2324 C50_1.1@3609.5,2314
NetC50_2_1: C50_2.1 R26_2.2 R27_2.1 | length 164.9
  Bottom Layer w10: R27_2.1@3479.5,1759 R26_2.2@3549.5,1759 3609.5,1699 C50_2.1@3609.5,1689
NetC50_3_1: C50_3.1 R26_3.2 R27_3.1 | length 164.9
  Bottom Layer w10: R27_3.1@3479.5,1138 R26_3.2@3549.5,1138 3609.5,1078 C50_3.1@3609.5,1068
NetC50_4_1: C50_4.1 R26_4.2 R27_4.1 | length 164.9
  Bottom Layer w10: R27_4.1@3479.5,514 R26_4.2@3549.5,514 3609.5,454 C50_4.1@3609.5,444
NetC52_1_2: C52_1.2 U7_1.1 | length 156.5
  Top Layer w10: C52_1.2@2408,2347 2432,2347 2479,2300 U7_1.1@2479,2234
NetC52_2_2: C52_2.2 U7_2.1 | length 156.5
  Top Layer w10: C52_2.2@2410,1726 2434,1726 2481,1679 U7_2.1@2481,1613
NetC52_3_2: C52_3.2 U7_3.1 | length 156.5
  Top Layer w10: C52_3.2@2415,1117 2439,1117 2486,1070 U7_3.1@2486,1004
NetC52_4_2: C52_4.2 U7_4.1 | length 156.5
  Top Layer w10: C52_4.2@2415,526 2439,526 2486,479 U7_4.1@2486,413
NetC54_1_2: C54_1.2 L7_1.2 L8_1.1 | length 137
  Top Layer w10: C54_1.2@2697,2463 L7_1.2@2697,2600
NetC54_2_2: C54_2.2 L7_2.2 L8_2.1 | length 137
  Top Layer w10: C54_2.2@2699,1842 L7_2.2@2699,1979
NetC54_3_2: C54_3.2 L7_3.2 L8_3.1 | length 137
  Top Layer w10: C54_3.2@2704,1233 L7_3.2@2704,1370
NetC54_4_2: C54_4.2 L7_4.2 L8_4.1 | length 171.1
  Top Layer w10: L8_4.1@2670,774 2670,764 2704,730 L7_4.2@2704,710 ; C54_4.2@2704,642 L7_4.2@2704,710 ; L7_4.2@2729,710 L7_4.2@2704,710
NetC55_2: C55.2 C56.2 L4.1 U12.4 | length 1621
  Top Layer w25: C56.2@4102,838 4282,1018 4384,1018 ; C55.2@4221,241 L4.1@4303,241 4303,292 4348,337 4348,705 4319,734 4319,818 4408,907 4408,994 4384,1018 ; U12.4@4407.01,1336.5 4407.01,1193.27 4384,1170.26 4384,1018
NetC57_2: C57.2 R68.2 U12.2 | length 397.6
  Top Layer w25: R68.2@4016,1125 C57.2@4090,1125 4190,1225 4252,1225 4272.99,1245.99 U12.2@4272.99,1336.5
NetC58_1_1: C58_1.1 Q1_1.3 R63_1.2 | length 249.5
  Bottom Layer w10: Q1_1.3@1233,2368.5 1269.5,2368.5 C58_1.1@1301,2400 1307,2406 1307,2529 1296,2540 R63_1.2@1276,2540 R63_1.2@1275,2541
NetC58_2_1: C58_2.1 Q1_2.3 R63_2.2 | length 249.5
  Bottom Layer w10: Q1_2.3@1233,1748.5 1269.5,1748.5 C58_2.1@1301,1780 1307,1786 1307,1909 1296,1920 R63_2.2@1276,1920 R63_2.2@1275,1921
NetC58_3_1: C58_3.1 Q1_3.3 R63_3.2 | length 249.5
  Bottom Layer w10: Q1_3.3@1233,1123.5 1269.5,1123.5 C58_3.1@1301,1155 1307,1161 1307,1284 1296,1295 R63_3.2@1276,1295 R63_3.2@1275,1296
NetC58_4_1: C58_4.1 Q1_4.3 R63_4.2 | length 249.5
  Bottom Layer w10: Q1_4.3@1233,503.5 1269.5,503.5 C58_4.1@1301,535 1307,541 1307,664 1296,675 R63_4.2@1276,675 R63_4.2@1275,676
NetC59_1_1: C59_1.1 Q1_1.2 R7_1.2 | length 141
  Bottom Layer w10: C59_1.1@1131,2540 R7_1.2@1131,2470 1131,2423 Q1_1.2@1148,2406
NetC59_2_1: C59_2.1 Q1_2.2 R7_2.2 | length 141
  Bottom Layer w10: C59_2.1@1131,1920 R7_2.2@1131,1850 1131,1803 Q1_2.2@1148,1786
NetC59_3_1: C59_3.1 Q1_3.2 R7_3.2 | length 141
  Bottom Layer w10: C59_3.1@1131,1295 R7_3.2@1131,1225 1131,1178 Q1_3.2@1148,1161
NetC59_4_1: C59_4.1 Q1_4.2 R7_4.2 | length 141
  Bottom Layer w10: C59_4.1@1131,675 R7_4.2@1131,605 1131,558 Q1_4.2@1148,541
NetDP1_2: DP1.2 R85.1 | length 66.5
  Top Layer w10: DP1.2@4554.82,2640.6 4554.82,2706.82 R85.1@4555,2707
NetJ1_38: J1.38 J1.39 R42.2 R73.2 | length 3666.3
  Top Layer w25: J1.38@322.11,221.75 648.02,221.75 731.27,305 R73.2@825,305 ; J1.39@322.11,2721.75 648.02,2721.75 729.27,2803 R42.2@808,2803
  Bottom Layer w10: J1.38@648.02,221.75 J1.38@648.02,227.98
  Bottom Layer w25: J1.38@648.02,227.98 516,360 516,2589.73 J1.39@648.02,2721.75
NetJ2_38: J2.38 J2.39 R17.2 R66.2 | length 3790
  Top Layer w25: R66.2@4946,2804 5037.24,2804 J2.39@5118.98,2722.25
  Bottom Layer w25: R17.2@4908,218 5120.73,218 J2.38@5124.82,222.09 ; J2.39@5118.98,2722.09 5439,2402.07 J2.38@5439,219 ; J2.38@5124.98,222.25 J2.38@5124.82,222.09 ; 5439,450 5211.09,222.09 J2.38@5124.82,222.09 ; 5439.89,2399.07 J2.39@5439.89,2719.25
NetL1_1_2: L1_1.2 R12_1.2 R13_1.2 | length 139.9
  Top Layer w10: R13_1.2@3252,2286 3252,2224 R12_1.2@3259,2217 L1_1.2@3327,2217
NetL1_2_2: L1_2.2 R12_2.2 R13_2.2 | length 139.9
  Top Layer w10: R13_2.2@3254,1665 3254,1603 R12_2.2@3261,1596 L1_2.2@3329,1596
NetL1_3_2: L1_3.2 R12_3.2 R13_3.2 | length 139.9
  Top Layer w10: R13_3.2@3259,1056 3259,994 R12_3.2@3266,987 L1_3.2@3334,987
NetL1_4_2: L1_4.2 R12_4.2 R13_4.2 | length 139.9
  Top Layer w10: R13_4.2@3259,465 3259,403 R12_4.2@3266,396 L1_4.2@3334,396
NetL2_1_2: L2_1.2 R77_1.2 | length 120.4
  Top Layer w10: L2_1.2@4652,2300 4700,2300 v1(4710,2310)
  Bottom Layer w10: v1(4710,2310) 4710,2340 R77_1.2@4730,2360
NetL2_1_5: L2_1.5 R78_1.1 | length 121.5
  Top Layer w10: v1(4815,2310) 4857,2310 L2_1.5@4867,2300
  Bottom Layer w10: R78_1.1@4790,2255 4790,2285 v1(4815,2310)
NetL2_2_2: L2_2.2 R77_2.2 | length 120.4
  Top Layer w10: L2_2.2@4652,1680 4700,1680 v1(4710,1690)
  Bottom Layer w10: v1(4710,1690) 4710,1720 R77_2.2@4730,1740
NetL2_2_5: L2_2.5 R78_2.1 | length 121.5
  Top Layer w10: v1(4815,1690) 4857,1690 L2_2.5@4867,1680
  Bottom Layer w10: R78_2.1@4790,1635 4790,1665 v1(4815,1690)
NetL2_3_2: L2_3.2 R77_3.2 | length 120.4
  Top Layer w10: L2_3.2@4652,1055 4700,1055 v1(4710,1065)
  Bottom Layer w10: v1(4710,1065) 4710,1095 R77_3.2@4730,1115
NetL2_3_5: L2_3.5 R78_3.1 | length 121.5
  Top Layer w10: v1(4815,1065) 4857,1065 L2_3.5@4867,1055
  Bottom Layer w10: R78_3.1@4790,1010 4790,1040 v1(4815,1065)
NetL2_4_2: L2_4.2 R77_4.2 | length 120.4
  Top Layer w10: L2_4.2@4652,435 4700,435 v1(4710,445)
  Bottom Layer w10: v1(4710,445) 4710,475 R77_4.2@4730,495
NetL2_4_5: L2_4.5 R78_4.1 | length 121.5
  Top Layer w10: v1(4815,445) 4857,445 L2_4.5@4867,435
  Bottom Layer w10: R78_4.1@4790,390 4790,420 v1(4815,445)
NetL8_1_2: L8_1.2 R64_1.1 R65_1.2 U7_1.6 | length 364.4
  Top Layer w10: L8_1.2@2637,2539 2575,2539 R64_1.1@2567,2531 2579,2519 U7_1.6@2579,2439 2579,2392 2642,2329 R65_1.2@2700,2329
NetL8_2_2: L8_2.2 R64_2.1 R65_2.2 U7_2.6 | length 364.4
  Top Layer w10: L8_2.2@2639,1918 2577,1918 R64_2.1@2569,1910 2581,1898 U7_2.6@2581,1818 2581,1771 2644,1708 R65_2.2@2702,1708
NetL8_3_2: L8_3.2 R64_3.1 R65_3.2 U7_3.6 | length 364.4
  Top Layer w10: L8_3.2@2644,1309 2582,1309 R64_3.1@2574,1301 2586,1289 U7_3.6@2586,1209 2586,1162 2649,1099 R65_3.2@2707,1099
NetL8_4_2: L8_4.2 R64_4.1 R65_4.2 U7_4.6 | length 364.4
  Top Layer w10: L8_4.2@2644,718 2582,718 R64_4.1@2574,710 2586,698 U7_4.6@2586,618 2586,571 2649,508 R65_4.2@2707,508
NetL9_1_2: L9_1.2 R44_1.2 R45_1.2 | length 137.5
  Top Layer w10: R45_1.2@3252,2353 3252,2415 R44_1.2@3258,2421 L9_1.2@3325,2421
NetL9_2_2: L9_2.2 R44_2.2 R45_2.2 | length 137.5
  Top Layer w10: R45_2.2@3254,1732 3254,1794 R44_2.2@3260,1800 L9_2.2@3327,1800
NetL9_3_2: L9_3.2 R44_3.2 R45_3.2 | length 137.5
  Top Layer w10: R45_3.2@3259,1123 3259,1185 R44_3.2@3265,1191 L9_3.2@3332,1191
NetL9_4_2: L9_4.2 R44_4.2 R45_4.2 | length 137.5
  Top Layer w10: R45_4.2@3259,532 3259,594 R44_4.2@3265,600 L9_4.2@3332,600
NetL11_1_2: L11_1.2 R79_1.2 | length 102.7
  Top Layer w10: L11_1.2@4650,2595 4650,2602 v1(4687,2639)
  Bottom Layer w10: v1(4687,2639) 4729,2639 R79_1.2@4730,2640
NetL11_1_5: L11_1.5 R80_1.1 | length 93
  Top Layer w10: v1(4819,2595) L11_1.5@4865,2595
  Bottom Layer w10: R80_1.1@4790,2560 4819,2589 v1(4819,2595)
NetL11_2_2: L11_2.2 R79_2.2 | length 102.7
  Top Layer w10: L11_2.2@4650,1975 4650,1982 v1(4687,2019)
  Bottom Layer w10: v1(4687,2019) 4729,2019 R79_2.2@4730,2020
NetL11_2_5: L11_2.5 R80_2.1 | length 93
  Top Layer w10: v1(4819,1975) L11_2.5@4865,1975
  Bottom Layer w10: R80_2.1@4790,1940 4819,1969 v1(4819,1975)
NetL11_3_2: L11_3.2 R79_3.2 | length 102.7
  Top Layer w10: L11_3.2@4650,1350 4650,1357 v1(4687,1394)
  Bottom Layer w10: v1(4687,1394) 4729,1394 R79_3.2@4730,1395
NetL11_3_5: L11_3.5 R80_3.1 | length 93
  Top Layer w10: v1(4819,1350) L11_3.5@4865,1350
  Bottom Layer w10: R80_3.1@4790,1315 4819,1344 v1(4819,1350)
NetL11_4_2: L11_4.2 R79_4.2 | length 102.7
  Top Layer w10: L11_4.2@4650,730 4650,737 v1(4687,774)
  Bottom Layer w10: v1(4687,774) 4729,774 R79_4.2@4730,775
NetL11_4_5: L11_4.5 R80_4.1 | length 93
  Top Layer w10: v1(4819,730) L11_4.5@4865,730
  Bottom Layer w10: R80_4.1@4790,695 4819,724 v1(4819,730)
NetLR_1: LR.1 R32.1 R34.2 U14.4 | length 1358.5
  Bottom Layer w10: LR.1@4130,979 4131,980 4192,980 ; U14.4@4256,915 4256,943 4271,958 R32.1@4271,980 4192,980 ; R34.2@4594,1831 4535,1831 4489,1785 4411,1785 4338,1712 4338,1397 4303,1362 4266.79,1362 4159.5,1254.71 4159.5,1012.5 4192,980
NetQ1_1_1: Q1_1.1 R6_1.1 | length 100
  Bottom Layer w10: R6_1.1@1148,2231 Q1_1.1@1148,2331
NetQ1_2_1: Q1_2.1 R6_2.1 | length 105
  Bottom Layer w10: R6_2.1@1148,1606 Q1_2.1@1148,1711
NetQ1_3_1: Q1_3.1 R6_3.1 | length 107.4
  Bottom Layer w10: R6_3.1@1147,979 1147,1085 Q1_3.1@1148,1086
NetQ1_4_1: Q1_4.1 R6_4.1 | length 103
  Bottom Layer w10: R6_4.1@1148,363 Q1_4.1@1148,466
NetR1_1_2: R1_1.2 R2_1.2 R3_1.1 | length 140
  Top Layer w10: R1_1.2@1121,2360 R2_1.2@1261,2360
NetR1_2_2: R1_2.2 R2_2.2 R3_2.1 | length 140
  Top Layer w10: R1_2.2@1121,1740 R2_2.2@1261,1740
NetR1_3_2: R1_3.2 R2_3.2 R3_3.1 | length 140
  Top Layer w10: R1_3.2@1121,1115 R2_3.2@1261,1115
NetR1_4_2: R1_4.2 R2_4.2 R3_4.1 | length 140
  Top Layer w10: R1_4.2@1121,495 R2_4.2@1261,495
NetR3_1_2: R3_1.2 R5_1.2 R10_1.2 | length 142.1
  Top Layer w10: R5_1.2@1121,2285 1256,2285 R10_1.2@1261,2290
NetR3_2_2: R3_2.2 R5_2.2 R10_2.2 | length 142.1
  Top Layer w10: R5_2.2@1121,1665 1256,1665 R10_2.2@1261,1670
NetR3_3_2: R3_3.2 R5_3.2 R10_3.2 | length 142.1
  Top Layer w10: R5_3.2@1121,1040 1256,1040 R10_3.2@1261,1045
  other v1: 1269,1007
NetR3_4_2: R3_4.2 R5_4.2 R10_4.2 | length 142.1
  Top Layer w10: R5_4.2@1121,420 1126,425 R10_4.2@1261,425
NetR8_1_1: R8_1.1 R9_1.1 U1_1.6 | length 168.3
  Top Layer w10: U1_1.6@2950,2240 2950,2154 R9_1.1@2958,2146 R8_1.1@3029,2146
NetR8_1_2: R8_1.2 R13_1.1 R14_1.1 U1_1.7 | length 353.9
  Top Layer w10: U1_1.7@3000,2240 3000,2204 3024,2180 3089,2180 ; R8_1.2@3089,2146 3089,2180 ; R13_1.1@3192,2286 3131,2286 R14_1.1@3123,2278 3122,2278 3089,2245 3089,2180
NetR8_2_1: R8_2.1 R9_2.1 U1_2.6 | length 168.3
  Top Layer w10: U1_2.6@2952,1619 2952,1533 R9_2.1@2960,1525 R8_2.1@3031,1525
NetR8_2_2: R8_2.2 R13_2.1 R14_2.1 U1_2.7 | length 353.9
  Top Layer w10: U1_2.7@3002,1619 3002,1583 3026,1559 3091,1559 ; R8_2.2@3091,1525 3091,1559 ; R13_2.1@3194,1665 3133,1665 R14_2.1@3125,1657 3124,1657 3091,1624 3091,1559
NetR8_3_1: R8_3.1 R9_3.1 U1_3.6 | length 168.3
  Top Layer w10: U1_3.6@2957,1010 2957,924 R9_3.1@2965,916 R8_3.1@3036,916
NetR8_3_2: R8_3.2 R13_3.1 R14_3.1 U1_3.7 | length 353.9
  Top Layer w10: U1_3.7@3007,1010 3007,974 3031,950 3096,950 ; R8_3.2@3096,916 3096,950 ; R13_3.1@3199,1056 3138,1056 R14_3.1@3130,1048 3129,1048 3096,1015 3096,950
NetR8_4_1: R8_4.1 R9_4.1 U1_4.6 | length 168.3
  Top Layer w10: U1_4.6@2957,419 2957,333 R9_4.1@2965,325 R8_4.1@3036,325
NetR8_4_2: R8_4.2 R13_4.1 R14_4.1 U1_4.7 | length 353.9
  Top Layer w10: U1_4.7@3007,419 3007,383 3031,359 3096,359 ; R8_4.2@3096,325 3096,359 ; R13_4.1@3199,465 3138,465 R14_4.1@3130,457 3129,457 3096,424 3096,359
NetR19_1_1: R19_1.1 R20_1.1 R21_1.1 | length 148.3
  Top Layer w10: R19_1.1@1111,2575 1176,2575 1181,2570 1236,2570 R20_1.1@1251,2585
NetR19_2_1: R19_2.1 R20_2.1 R21_2.1 | length 148.3
  Top Layer w10: R19_2.1@1111,1955 1176,1955 1181,1950 1236,1950 R20_2.1@1251,1965
NetR19_3_1: R19_3.1 R20_3.1 R21_3.1 | length 148.3
  Top Layer w10: R19_3.1@1111,1330 1176,1330 R21_3.1@1181,1325 1236,1325 R20_3.1@1251,1340
NetR19_4_1: R19_4.1 R20_4.1 R21_4.1 | length 148.3
  Top Layer w10: R19_4.1@1111,710 1176,710 1181,705 1236,705 R20_4.1@1251,720
NetR21_1_2: R21_1.2 R36_1.1 R37_1.1 | length 146.2
  Top Layer w10: R36_1.1@1111,2505 1176,2505 1181,2510 1241,2510 R37_1.1@1251,2500
NetR21_2_2: R21_2.2 R36_2.1 R37_2.1 | length 146.2
  Top Layer w10: R36_2.1@1111,1885 1176,1885 1181,1890 1241,1890 R37_2.1@1251,1880
NetR21_3_2: R21_3.2 R36_3.1 R37_3.1 | length 146.2
  Top Layer w10: R36_3.1@1111,1260 1176,1260 R21_3.2@1181,1265 1241,1265 R37_3.1@1251,1255
NetR21_4_2: R21_4.2 R36_4.1 R37_4.1 | length 146.2
  Top Layer w10: R36_4.1@1111,640 1176,640 1181,645 1241,645 R37_4.1@1251,635
NetR22_1_1: R22_1.1 U4_1.4 | length 74.1
  Bottom Layer w10: R22_1.1@3552.5,2652 3562.5,2662 U4_1.4@3622.5,2662
NetR22_2_1: R22_2.1 U4_2.4 | length 74.1
  Bottom Layer w10: R22_2.1@3552.5,2027 3562.5,2037 U4_2.4@3622.5,2037
NetR22_3_1: R22_3.1 U4_3.4 | length 74.1
  Bottom Layer w10: R22_3.1@3552.5,1406 3562.5,1416 U4_3.4@3622.5,1416
NetR22_4_1: R22_4.1 U4_4.4 | length 74.1
  Bottom Layer w10: R22_4.1@3552.5,782 3562.5,792 U4_4.4@3622.5,792
NetR24_1_1: R24_1.1 U3_1.4 | length 183.7
  Bottom Layer w10: R24_1.1@3458.5,2245 3484.5,2271 3597.5,2271 U3_1.4@3621.5,2247
NetR24_2_1: R24_2.1 U3_2.4 | length 183.7
  Bottom Layer w10: R24_2.1@3458.5,1620 3484.5,1646 3597.5,1646 U3_2.4@3621.5,1622
NetR24_3_1: R24_3.1 U3_3.4 | length 183.7
  Bottom Layer w10: R24_3.1@3458.5,999 3484.5,1025 3597.5,1025 U3_3.4@3621.5,1001
NetR24_4_1: R24_4.1 U3_4.4 | length 183.7
  Bottom Layer w10: R24_4.1@3458.5,375 3484.5,401 3597.5,401 U3_4.4@3621.5,377
NetR26_1_1: R26_1.1 U6_1.4 | length 74.1
  Bottom Layer w10: R26_1.1@3549.5,2444 3559.5,2454 U6_1.4@3619.5,2454
NetR26_2_1: R26_2.1 U6_2.4 | length 74.1
  Bottom Layer w10: R26_2.1@3549.5,1819 3559.5,1829 U6_2.4@3619.5,1829
NetR26_3_1: R26_3.1 U6_3.4 | length 74.1
  Bottom Layer w10: R26_3.1@3549.5,1198 3559.5,1208 U6_3.4@3619.5,1208
NetR26_4_1: R26_4.1 U6_4.4 | length 74.1
  Bottom Layer w10: R26_4.1@3549.5,574 3559.5,584 U6_4.4@3619.5,584
NetR29_2: R29.2 U10.5 | length 208
  Bottom Layer w10: U10.5@4466,1555 R29.2@4674,1555
NetR40_1_1: R40_1.1 R43_1.1 U1_1.2 | length 220.8
  Top Layer w10: R43_1.1@2969,2537 3000,2506 ; U1_1.2@3000,2445 3000,2506 ; R40_1.1@3065,2595 3000,2530 3000,2506
NetR40_1_2: R40_1.2 R45_1.1 R49_1.1 U1_1.1 | length 324.4
  Top Layer w10: R40_1.2@3065,2535 3050,2520 U1_1.1@3050,2445 3050,2391 3089,2352 R49_1.1@3123,2352 ; R49_1.1@3107,2353 R45_1.1@3192,2353
NetR40_2_1: R40_2.1 R43_2.1 U1_2.2 | length 220.8
  Top Layer w10: R43_2.1@2971,1916 3002,1885 ; U1_2.2@3002,1824 3002,1885 ; R40_2.1@3067,1974 3002,1909 3002,1885
NetR40_2_2: R40_2.2 R45_2.1 R49_2.1 U1_2.1 | length 324.4
  Top Layer w10: R40_2.2@3067,1914 3052,1899 U1_2.1@3052,1824 3052,1770 3091,1731 R49_2.1@3125,1731 ; R49_2.1@3109,1732 R45_2.1@3194,1732
NetR40_3_1: R40_3.1 R43_3.1 U1_3.2 | length 220.8
  Top Layer w10: R43_3.1@2976,1307 3007,1276 ; U1_3.2@3007,1215 3007,1276 ; R40_3.1@3072,1365 3007,1300 3007,1276
NetR40_3_2: R40_3.2 R45_3.1 R49_3.1 U1_3.1 | length 324.4
  Top Layer w10: R40_3.2@3072,1305 3057,1290 U1_3.1@3057,1215 3057,1161 3096,1122 R49_3.1@3130,1122 ; R49_3.1@3114,1123 R45_3.1@3199,1123
NetR40_4_1: R40_4.1 R43_4.1 U1_4.2 | length 220.8
  Top Layer w10: R43_4.1@2976,716 3007,685 ; U1_4.2@3007,624 3007,685 ; R40_4.1@3072,774 3007,709 3007,685
NetR40_4_2: R40_4.2 R45_4.1 R49_4.1 U1_4.1 | length 324.4
  Top Layer w10: R40_4.2@3072,714 3057,699 U1_4.1@3057,624 3057,570 3096,531 R49_4.1@3130,531 ; R49_4.1@3114,532 R45_4.1@3199,532
NetR46_1_1: R46_1.1 U7_1.8 | length 77.6
  Top Layer w10: R46_1.1@2408,2423 2463,2423 U7_1.8@2479,2439
NetR46_2_1: R46_2.1 U7_2.8 | length 77.6
  Top Layer w10: R46_2.1@2410,1802 2465,1802 U7_2.8@2481,1818
NetR46_3_1: R46_3.1 U7_3.8 | length 77.6
  Top Layer w10: R46_3.1@2415,1193 2470,1193 U7_3.8@2486,1209
NetR46_4_1: R46_4.1 U7_4.8 | length 77.6
  Top Layer w10: R46_4.1@2415,602 2470,602 U7_4.8@2486,618
NetR47_1_2: R47_1.2 U7_1.3 | length 113.4
  Top Layer w10: U7_1.3@2579,2234 2579,2197 R47_1.2@2633,2143
NetR47_2_2: R47_2.2 U7_2.3 | length 113.4
  Top Layer w10: U7_2.3@2581,1613 2581,1576 R47_2.2@2635,1522